# Altium PCB Mosquito.PcbDoc
Units mm, origin at the board's own origin, x right, y up, seen from the top; angles counter-clockwise.
Board outline 150 x 220 mm, 2 copper layers (Top Layer, Bottom Layer), stack 5.071 mm thick; 400 components, 2 nets, 400 pads, 0 vias.
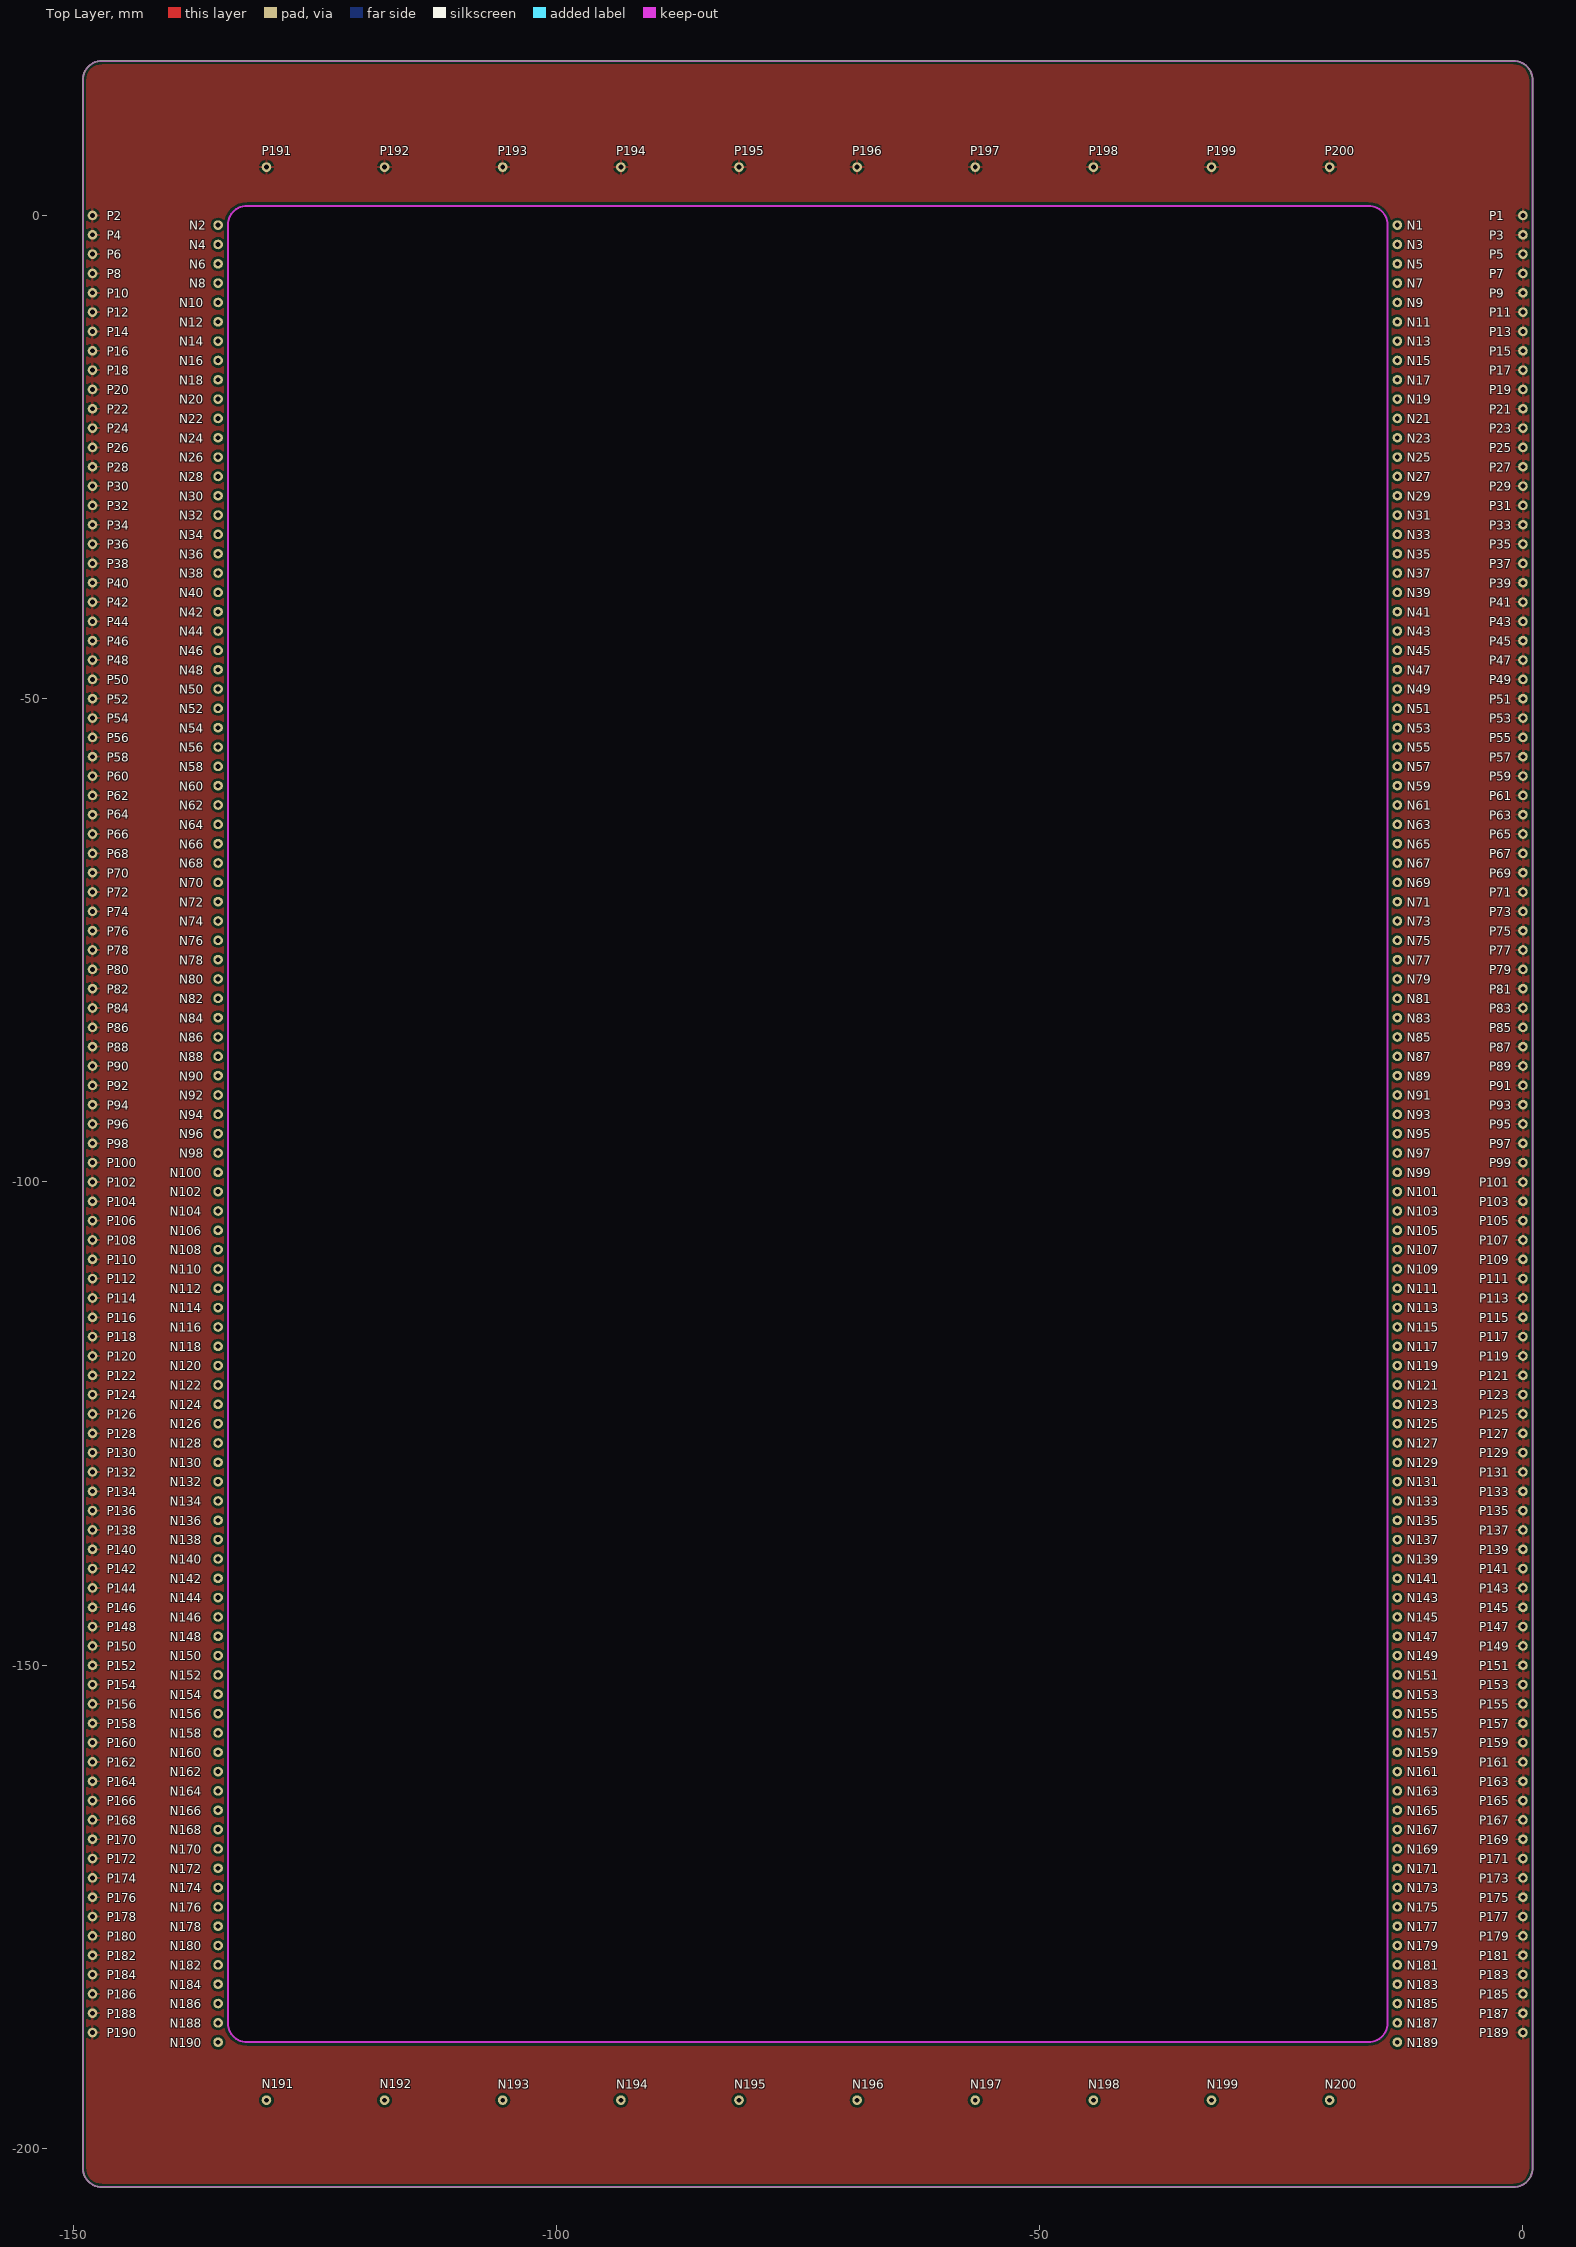
[diagram p0: Top Layer view]
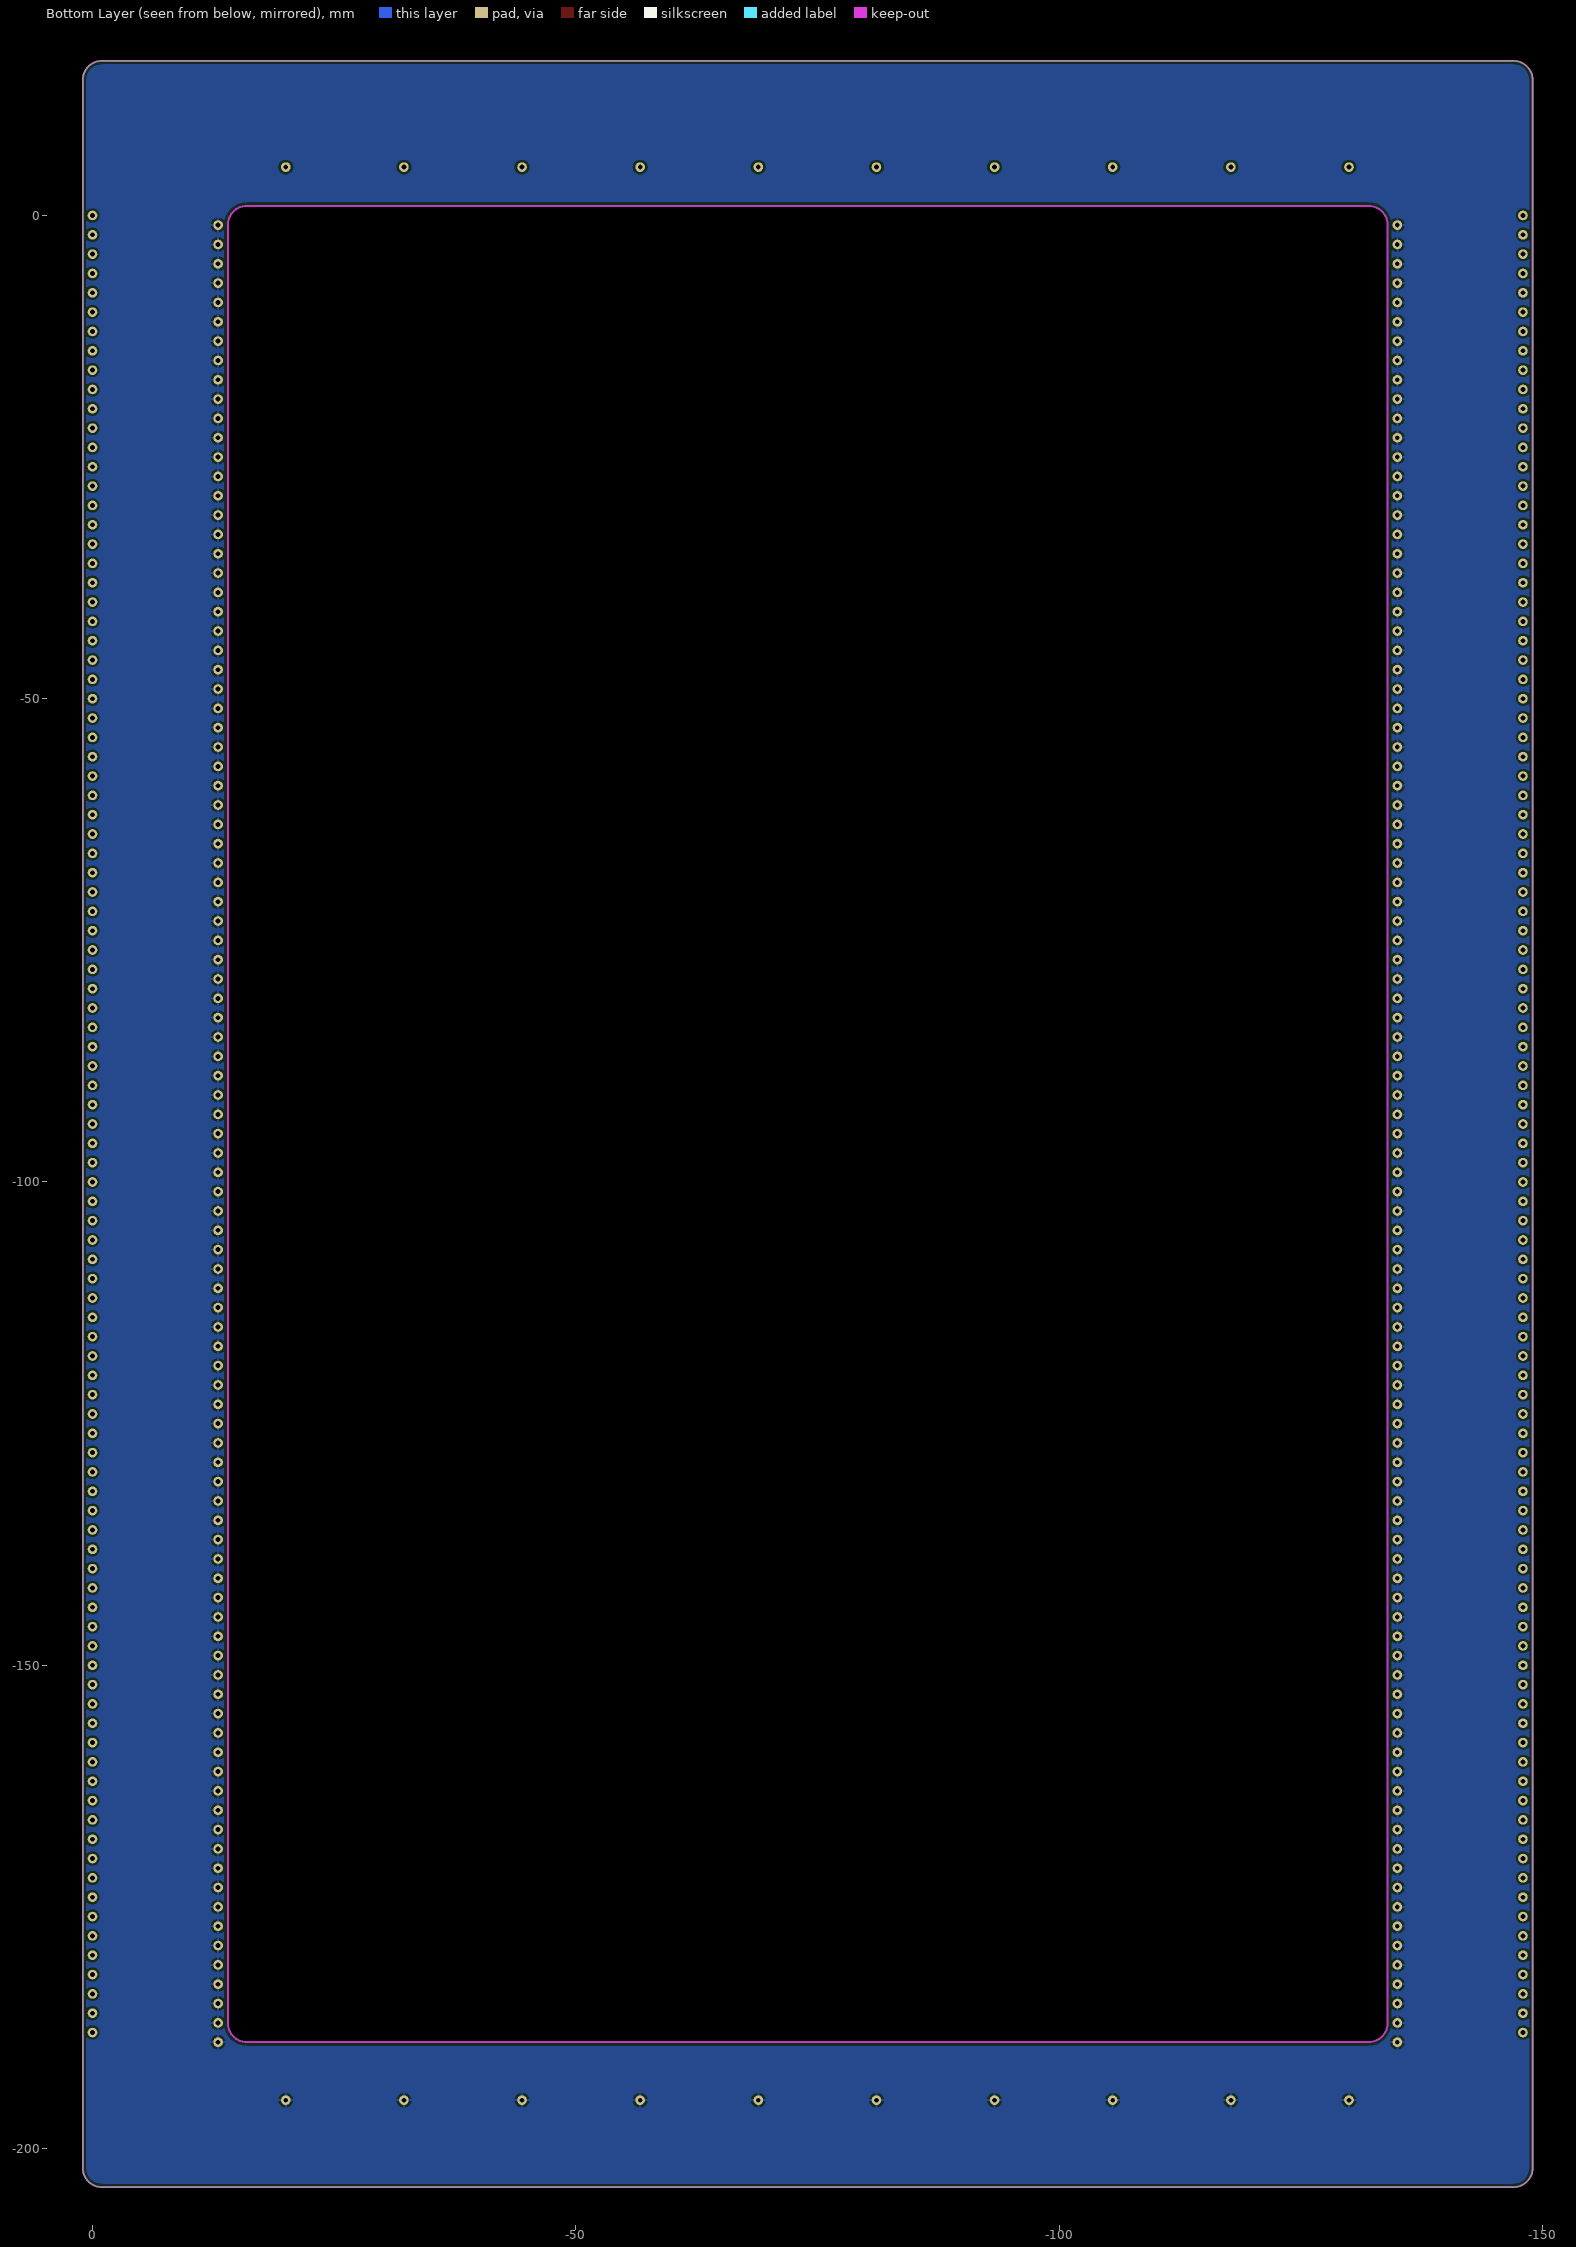
[diagram p1: Bottom Layer view, seen from below]

## Layer stack, top to bottom
Top Layer: signal copper 0.0356
Dielectric: core 5, FR-4, Dk 4.8
Bottom Layer: signal copper 0.0356

## Board outline
-147,-204 cw(c-147,-202) -149,-202 -149,14 cw(c-147,14) -147,16 -1,16 cw(c-1,14) 1,14 1,-202 cw(c-1,-202) -1,-204
cut-out: -134,-187 -134,-1 cw(c-132,-1) -132,1 -16,1 cw(c-16,-1) -14,-1 -14,-187 cw(c-16,-187) -16,-189 -132,-189 cw(c-132,-187)

## Design rules (kind name [scope] priority, off if disabled: settings)
Clearance [All] p1: gap=0.254
ComponentClearance [All] p1: gap=0.1 collisioncheckmode=3 verticalgap=0.1 showdistances=FALSE
HoleToHoleClearance [All] p1: gap=0.127 allowstackedmicrovias=TRUE
MinimumSolderMaskSliver [All] p1: minsoldermaskwidth=0.127
PolygonConnect [All] p1: connectstyle=Relief reliefconductorwidth=0.254 reliefentries=4 polygonreliefangle="90 Angle"
RoutingVias [All] p1: holewidth=0.711 width=1.27 viastyle="Through Hole" minholewidth=0.711 minwidth=1.27 maxholewidth=0.711 maxwidth=1.27
SilkscreenOverComponentPads [All] p1: minsilkscreentomaskgap=0.127
SolderMaskExpansion [All] p1: expansion=0.102
Width [All] p1: maxlimit=0.254 minlimit=0.254 preferedwidth=0.254
24 further rules are at their usual default settings.

## Classes and differential pairs
component class Mosquito: N1 N2 N3 N4 N5 N6 N7 N8 N9 N10 N11 N12 N13 N14 N15 N16 N17 N18 N19 N20 N21 N22 N23 N24 N25 N26 N27 N28 N29 N30 N31 N32 N33 N34 N35 N36 N37 N38 N39 N40 N41 N42 N43 N44 N45 N46 N47 N48 N49 N50 N51 N52 N53 N54 N55 N56 N57 N58 N59 N60 N61 N62 N63 N64 N65 N66 N67 N68 N69 N70 N71 N72 N73 N74 N75 N76 N77 N78 N79 N80 P1 P2 P3 P4 P5 P6 P7 P8 P9 P10 P11 P12 P13 P14 P15 P16 P17 P18 P19 P20 P21 P22 P23 P24 P25 P26 P27 P28 P29 P30 P31 P32 P33 P34 P35 P36 P37 P38 P39 P40 P41 P42 P43 P44 P45 P46 P47 P48 P49 P50 P51 P52 P53 P54 P55 P56 P57 P58 P59 P60 P61 P62 P63 P64 P65 P66 P67 P68 P69 P70 P71 P72 P73 P74 P75 P76 P77 P78 P79 P80
component class Mosquito2: N81 N82 N83 N84 N85 N86 N87 N88 N89 N90 N91 N92 N93 N94 N95 N96 N97 N98 N99 N100 N101 N102 N103 N104 N105 N106 N107 N108 N109 N110 N111 N112 N113 N114 N115 N116 N117 N118 N119 N120 N121 N122 N123 N124 N125 N126 N127 N128 N129 N130 N131 N132 N133 N134 N135 N136 N137 N138 N139 N140 N141 N142 N143 N144 N145 N146 N147 N148 N149 N150 N151 N152 N153 N154 N155 N156 N157 N158 N159 N160 P81 P82 P83 P84 P85 P86 P87 P88 P89 P90 P91 P92 P93 P94 P95 P96 P97 P98 P99 P100 P101 P102 P103 P104 P105 P106 P107 P108 P109 P110 P111 P112 P113 P114 P115 P116 P117 P118 P119 P120 P121 P122 P123 P124 P125 P126 P127 P128 P129 P130 P131 P132 P133 P134 P135 P136 P137 P138 P139 P140 P141 P142 P143 P144 P145 P146 P147 P148 P149 P150 P151 P152 P153 P154 P155 P156 P157 P158 P159 P160
component class Mosquito3: N161 N162 N163 N164 N165 N166 N167 N168 N169 N170 N171 N172 N173 N174 N175 N176 N177 N178 N179 N180 N181 N182 N183 N184 N185 N186 N187 N188 N189 N190 N191 N192 N193 N194 N195 N196 N197 N198 N199 N200 P161 P162 P163 P164 P165 P166 P167 P168 P169 P170 P171 P172 P173 P174 P175 P176 P177 P178 P179 P180 P181 P182 P183 P184 P185 P186 P187 P188 P189 P190 P191 P192 P193 P194 P195 P196 P197 P198 P199 P200

## Components (designator, comment, footprint, x,y, rotation, side; value= is the part's Value field where it differs from the comment)
N1 "Pad_N" PAD -13,-1 r0 top
N2 "Pad_N" PAD -135,-1 r0 top
N3 "Pad_N" PAD -13,-3 r0 top
N4 "Pad_N" PAD -135,-3 r90 top
N5 "Pad_N" PAD -13,-5 r180 top
N6 "Pad_N" PAD -135,-5 r0 top
N7 "Pad_N" PAD -13,-7 r0 top
N8 "Pad_N" PAD -135,-7 r0 top
N9 "Pad_N" PAD -13,-9 r0 top
N10 "Pad_N" PAD -135,-9 r90 top
N11 "Pad_N" PAD -13,-11 r90 top
N12 "Pad_N" PAD -135,-11 r0 top
N13 "Pad_N" PAD -13,-13 r90 top
N14 "Pad_N" PAD -135,-13 r0 top
N15 "Pad_N" PAD -13,-15 r90 top
N16 "Pad_N" PAD -135,-15 r0 top
N17 "Pad_N" PAD -13,-17 r90 top
N18 "Pad_N" PAD -135,-17 r0 top
N19 "Pad_N" PAD -13,-19 r90 top
N20 "Pad_N" PAD -135,-19 r0 top
N21 "Pad_N" PAD -13,-21 r90 top
N22 "Pad_N" PAD -135,-21 r0 top
N23 "Pad_N" PAD -13,-23 r90 top
N24 "Pad_N" PAD -135,-23 r0 top
N25 "Pad_N" PAD -13,-25 r90 top
N26 "Pad_N" PAD -135,-25 r0 top
N27 "Pad_N" PAD -13,-27 r90 top
N28 "Pad_N" PAD -135,-27 r0 top
N29 "Pad_N" PAD -13,-29 r90 top
N30 "Pad_N" PAD -135,-29 r0 top
N31 "Pad_N" PAD -13,-31 r90 top
N32 "Pad_N" PAD -135,-31 r0 top
N33 "Pad_N" PAD -13,-33 r90 top
N34 "Pad_N" PAD -135,-33 r0 top
N35 "Pad_N" PAD -13,-35 r90 top
N36 "Pad_N" PAD -135,-35 r0 top
N37 "Pad_N" PAD -13,-37 r90 top
N38 "Pad_N" PAD -135,-37 r0 top
N39 "Pad_N" PAD -13,-39 r90 top
N40 "Pad_N" PAD -135,-39 r0 top
N41 "Pad_N" PAD -13,-41 r90 top
N42 "Pad_N" PAD -135,-41 r0 top
N43 "Pad_N" PAD -13,-43 r90 top
N44 "Pad_N" PAD -135,-43 r0 top
N45 "Pad_N" PAD -13,-45 r90 top
N46 "Pad_N" PAD -135,-45 r0 top
N47 "Pad_N" PAD -13,-47 r90 top
N48 "Pad_N" PAD -135,-47 r0 top
N49 "Pad_N" PAD -13,-49 r90 top
N50 "Pad_N" PAD -135,-49 r0 top
N51 "Pad_N" PAD -13,-51 r90 top
N52 "Pad_N" PAD -135,-51 r0 top
N53 "Pad_N" PAD -13,-53 r90 top
N54 "Pad_N" PAD -135,-53 r0 top
N55 "Pad_N" PAD -13,-55 r90 top
N56 "Pad_N" PAD -135,-55 r0 top
N57 "Pad_N" PAD -13,-57 r90 top
N58 "Pad_N" PAD -135,-57 r0 top
N59 "Pad_N" PAD -13,-59 r90 top
N60 "Pad_N" PAD -135,-59 r0 top
N61 "Pad_N" PAD -13,-61 r90 top
N62 "Pad_N" PAD -135,-61 r0 top
N63 "Pad_N" PAD -13,-63 r90 top
N64 "Pad_N" PAD -135,-63 r0 top
N65 "Pad_N" PAD -13,-65 r90 top
N66 "Pad_N" PAD -135,-65 r0 top
N67 "Pad_N" PAD -13,-67 r90 top
N68 "Pad_N" PAD -135,-67 r0 top
N69 "Pad_N" PAD -13,-69 r90 top
N70 "Pad_N" PAD -135,-69 r0 top
N71 "Pad_N" PAD -13,-71 r90 top
N72 "Pad_N" PAD -135,-71 r0 top
N73 "Pad_N" PAD -13,-73 r90 top
N74 "Pad_N" PAD -135,-73 r0 top
N75 "Pad_N" PAD -13,-75 r90 top
N76 "Pad_N" PAD -135,-75 r0 top
N77 "Pad_N" PAD -13,-77 r90 top
N78 "Pad_N" PAD -135,-77 r0 top
N79 "Pad_N" PAD -13,-79 r90 top
N80 "Pad_N" PAD -135,-79 r0 top
N81 "Pad_N" Pad -13,-81 r0 top
N82 "Pad_N" Pad -135,-81 r0 top
N83 "Pad_N" Pad -13,-83 r0 top
N84 "Pad_N" Pad -135,-83 r0 top
N85 "Pad_N" Pad -13,-85 r0 top
N86 "Pad_N" Pad -135,-85 r0 top
N87 "Pad_N" Pad -13,-87 r0 top
N88 "Pad_N" Pad -135,-87 r0 top
N89 "Pad_N" Pad -13,-89 r0 top
N90 "Pad_N" Pad -135,-89 r0 top
N91 "Pad_N" Pad -13,-91 r0 top
N92 "Pad_N" Pad -135,-91 r0 top
N93 "Pad_N" Pad -13,-93 r0 top
N94 "Pad_N" Pad -135,-93 r0 top
N95 "Pad_N" Pad -13,-95 r0 top
N96 "Pad_N" Pad -135,-95 r0 top
N97 "Pad_N" Pad -13,-97 r0 top
N98 "Pad_N" Pad -135,-97 r0 top
N99 "Pad_N" Pad -13,-99 r0 top
N100 "Pad_N" Pad -135,-99 r0 top
N101 "Pad_N" Pad -13,-101 r0 top
N102 "Pad_N" Pad -135,-101 r0 top
N103 "Pad_N" Pad -13,-103 r0 top
N104 "Pad_N" Pad -135,-103 r0 top
N105 "Pad_N" Pad -13,-105 r0 top
N106 "Pad_N" Pad -135,-105 r0 top
N107 "Pad_N" Pad -13,-107 r0 top
N108 "Pad_N" Pad -135,-107 r0 top
N109 "Pad_N" Pad -13,-109 r0 top
N110 "Pad_N" Pad -135,-109 r0 top
N111 "Pad_N" Pad -13,-111 r0 top
N112 "Pad_N" Pad -135,-111 r0 top
N113 "Pad_N" Pad -13,-113 r0 top
N114 "Pad_N" Pad -135,-113 r0 top
N115 "Pad_N" Pad -13,-115 r0 top
N116 "Pad_N" Pad -135,-115 r0 top
N117 "Pad_N" Pad -13,-117 r0 top
N118 "Pad_N" Pad -135,-117 r0 top
N119 "Pad_N" Pad -13,-119 r0 top
N120 "Pad_N" Pad -135,-119 r0 top
N121 "Pad_N" Pad -13,-121 r0 top
N122 "Pad_N" Pad -135,-121 r0 top
N123 "Pad_N" Pad -13,-123 r0 top
N124 "Pad_N" Pad -135,-123 r0 top
N125 "Pad_N" Pad -13,-125 r0 top
N126 "Pad_N" Pad -135,-125 r0 top
N127 "Pad_N" Pad -13,-127 r0 top
N128 "Pad_N" Pad -135,-127 r0 top
N129 "Pad_N" Pad -13,-129 r0 top
N130 "Pad_N" Pad -135,-129 r0 top
N131 "Pad_N" Pad -13,-131 r0 top
N132 "Pad_N" Pad -135,-131 r0 top
N133 "Pad_N" Pad -13,-133 r0 top
N134 "Pad_N" Pad -135,-133 r0 top
N135 "Pad_N" Pad -13,-135 r0 top
N136 "Pad_N" Pad -135,-135 r0 top
N137 "Pad_N" Pad -13,-137 r0 top
N138 "Pad_N" Pad -135,-137 r0 top
N139 "Pad_N" Pad -13,-139 r0 top
N140 "Pad_N" Pad -135,-139 r0 top
N141 "Pad_N" Pad -13,-141 r0 top
N142 "Pad_N" Pad -135,-141 r0 top
N143 "Pad_N" Pad -13,-143 r0 top
N144 "Pad_N" Pad -135,-143 r0 top
N145 "Pad_N" Pad -13,-145 r0 top
N146 "Pad_N" Pad -135,-145 r0 top
N147 "Pad_N" Pad -13,-147 r0 top
N148 "Pad_N" Pad -135,-147 r0 top
N149 "Pad_N" Pad -13,-149 r0 top
N150 "Pad_N" Pad -135,-149 r0 top
N151 "Pad_N" Pad -13,-151 r0 top
N152 "Pad_N" Pad -135,-151 r0 top
N153 "Pad_N" Pad -13,-153 r0 top
N154 "Pad_N" Pad -135,-153 r0 top
N155 "Pad_N" Pad -13,-155 r0 top
N156 "Pad_N" Pad -135,-155 r0 top
N157 "Pad_N" Pad -13,-157 r0 top
N158 "Pad_N" Pad -135,-157 r0 top
N159 "Pad_N" Pad -13,-159 r0 top
N160 "Pad_N" Pad -135,-159 r0 top
N161 "Pad_N" Pad -13,-161 r0 top
N162 "Pad_N" Pad -135,-161 r0 top
N163 "Pad_N" Pad -13,-163 r0 top
N164 "Pad_N" Pad -135,-163 r0 top
N165 "Pad_N" Pad -13,-165 r0 top
N166 "Pad_N" Pad -135,-165 r0 top
N167 "Pad_N" Pad -13,-167 r0 top
N168 "Pad_N" Pad -135,-167 r0 top
N169 "Pad_N" Pad -13,-169 r0 top
N170 "Pad_N" Pad -135,-169 r0 top
N171 "Pad_N" Pad -13,-171 r0 top
N172 "Pad_N" Pad -135,-171 r0 top
N173 "Pad_N" Pad -13,-173 r0 top
N174 "Pad_N" Pad -135,-173 r0 top
N175 "Pad_N" Pad -13,-175 r0 top
N176 "Pad_N" Pad -135,-175 r0 top
N177 "Pad_N" Pad -13,-177 r0 top
N178 "Pad_N" Pad -135,-177 r0 top
N179 "Pad_N" Pad -13,-179 r0 top
N180 "Pad_N" Pad -135,-179 r0 top
N181 "Pad_N" Pad -13,-181 r0 top
N182 "Pad_N" Pad -135,-181 r0 top
N183 "Pad_N" Pad -13,-183 r0 top
N184 "Pad_N" Pad -135,-183 r0 top
N185 "Pad_N" Pad -13,-185 r0 top
N186 "Pad_N" Pad -135,-185 r0 top
N187 "Pad_N" Pad -13,-187 r0 top
N188 "Pad_N" Pad -135,-187 r0 top
N189 "Pad_N" Pad -13,-189 r0 top
N190 "Pad_N" Pad -135,-189 r0 top
N191 "Pad_N" Pad -130,-195 r90 top
N192 "Pad_N" Pad -117.778,-195 r90 top
N193 "Pad_N" Pad -105.556,-195 r90 top
N194 "Pad_N" Pad -93.333,-195 r90 top
N195 "Pad_N" Pad -81.111,-195 r90 top
N196 "Pad_N" Pad -68.889,-195 r90 top
N197 "Pad_N" Pad -56.667,-195 r90 top
N198 "Pad_N" Pad -44.444,-195 r90 top
N199 "Pad_N" Pad -32.222,-195 r90 top
N200 "Pad_N" Pad -20,-195 r90 top
P1 "Pad_P" PAD 0,0 r0 top
P2 "Pad_P" PAD -148,0 r0 top
P3 "Pad_P" PAD 0,-2 r0 top
P4 "Pad_P" PAD -148,-2 r0 top
P5 "Pad_P" PAD 0,-4 r0 top
P6 "Pad_P" PAD -148,-4 r0 top
P7 "Pad_P" PAD 0,-6 r0 top
P8 "Pad_P" PAD -148,-6 r0 top
P9 "Pad_P" PAD 0,-8 r0 top
P10 "Pad_P" PAD -148,-8 r90 top
P11 "Pad_P" PAD 0,-10 r90 top
P12 "Pad_P" PAD -148,-10 r0 top
P13 "Pad_P" PAD 0,-12 r90 top
P14 "Pad_P" PAD -148,-12 r0 top
P15 "Pad_P" PAD 0,-14 r90 top
P16 "Pad_P" PAD -148,-14 r0 top
P17 "Pad_P" PAD 0,-16 r90 top
P18 "Pad_P" PAD -148,-16 r0 top
P19 "Pad_P" PAD 0,-18 r90 top
P20 "Pad_P" PAD -148,-18 r0 top
P21 "Pad_P" PAD 0,-20 r90 top
P22 "Pad_P" PAD -148,-20 r0 top
P23 "Pad_P" PAD 0,-22 r90 top
P24 "Pad_P" PAD -148,-22 r0 top
P25 "Pad_P" PAD 0,-24 r90 top
P26 "Pad_P" PAD -148,-24 r0 top
P27 "Pad_P" PAD 0,-26 r90 top
P28 "Pad_P" PAD -148,-26 r0 top
P29 "Pad_P" PAD 0,-28 r90 top
P30 "Pad_P" PAD -148,-28 r0 top
P31 "Pad_P" PAD 0,-30 r90 top
P32 "Pad_P" PAD -148,-30 r0 top
P33 "Pad_P" PAD 0,-32 r90 top
P34 "Pad_P" PAD -148,-32 r0 top
P35 "Pad_P" PAD 0,-34 r90 top
P36 "Pad_P" PAD -148,-34 r0 top
P37 "Pad_P" PAD 0,-36 r90 top
P38 "Pad_P" PAD -148,-36 r0 top
P39 "Pad_P" PAD 0,-38 r90 top
P40 "Pad_P" PAD -148,-38 r0 top
P41 "Pad_P" PAD 0,-40 r90 top
P42 "Pad_P" PAD -148,-40 r0 top
P43 "Pad_P" PAD 0,-42 r90 top
P44 "Pad_P" PAD -148,-42 r0 top
P45 "Pad_P" PAD 0,-44 r90 top
P46 "Pad_P" PAD -148,-44 r0 top
P47 "Pad_P" PAD 0,-46 r90 top
P48 "Pad_P" PAD -148,-46 r0 top
P49 "Pad_P" PAD 0,-48 r90 top
P50 "Pad_P" PAD -148,-48 r0 top
P51 "Pad_P" PAD 0,-50 r90 top
P52 "Pad_P" PAD -148,-50 r0 top
P53 "Pad_P" PAD 0,-52 r90 top
P54 "Pad_P" PAD -148,-52 r0 top
P55 "Pad_P" PAD 0,-54 r90 top
P56 "Pad_P" PAD -148,-54 r0 top
P57 "Pad_P" PAD 0,-56 r90 top
P58 "Pad_P" PAD -148,-56 r0 top
P59 "Pad_P" PAD 0,-58 r90 top
P60 "Pad_P" PAD -148,-58 r0 top
P61 "Pad_P" PAD 0,-60 r90 top
P62 "Pad_P" PAD -148,-60 r0 top
P63 "Pad_P" PAD 0,-62 r90 top
P64 "Pad_P" PAD -148,-62 r0 top
P65 "Pad_P" PAD 0,-64 r90 top
P66 "Pad_P" PAD -148,-64 r0 top
P67 "Pad_P" PAD 0,-66 r90 top
P68 "Pad_P" PAD -148,-66 r0 top
P69 "Pad_P" PAD 0,-68 r90 top
P70 "Pad_P" PAD -148,-68 r0 top
P71 "Pad_P" PAD 0,-70 r90 top
P72 "Pad_P" PAD -148,-70 r0 top
P73 "Pad_P" PAD 0,-72 r90 top
P74 "Pad_P" PAD -148,-72 r0 top
P75 "Pad_P" PAD 0,-74 r90 top
P76 "Pad_P" PAD -148,-74 r0 top
P77 "Pad_P" PAD 0,-76 r90 top
P78 "Pad_P" PAD -148,-76 r0 top
P79 "Pad_P" PAD 0,-78 r90 top
P80 "Pad_P" PAD -148,-78 r0 top
P81 "Pad_P" Pad 0,-80 r0 top
P82 "Pad_P" Pad -148,-80 r0 top
P83 "Pad_P" Pad 0,-82 r0 top
P84 "Pad_P" Pad -148,-82 r0 top
P85 "Pad_P" Pad 0,-84 r0 top
P86 "Pad_P" Pad -148,-84 r0 top
P87 "Pad_P" Pad 0,-86 r0 top
P88 "Pad_P" Pad -148,-86 r0 top
P89 "Pad_P" Pad 0,-88 r0 top
P90 "Pad_P" Pad -148,-88 r0 top
P91 "Pad_P" Pad 0,-90 r0 top
P92 "Pad_P" Pad -148,-90 r0 top
P93 "Pad_P" Pad 0,-92 r0 top
P94 "Pad_P" Pad -148,-92 r0 top
P95 "Pad_P" Pad 0,-94 r0 top
P96 "Pad_P" Pad -148,-94 r0 top
P97 "Pad_P" Pad 0,-96 r0 top
P98 "Pad_P" Pad -148,-96 r0 top
P99 "Pad_P" Pad 0,-98 r0 top
P100 "Pad_P" Pad -148,-98 r0 top
P101 "Pad_P" Pad 0,-100 r0 top
P102 "Pad_P" Pad -148,-100 r0 top
P103 "Pad_P" Pad 0,-102 r0 top
P104 "Pad_P" Pad -148,-102 r0 top
P105 "Pad_P" Pad 0,-104 r0 top
P106 "Pad_P" Pad -148,-104 r0 top
P107 "Pad_P" Pad 0,-106 r0 top
P108 "Pad_P" Pad -148,-106 r0 top
P109 "Pad_P" Pad 0,-108 r0 top
P110 "Pad_P" Pad -148,-108 r0 top
P111 "Pad_P" Pad 0,-110 r0 top
P112 "Pad_P" Pad -148,-110 r0 top
P113 "Pad_P" Pad 0,-112 r0 top
P114 "Pad_P" Pad -148,-112 r0 top
P115 "Pad_P" Pad 0,-114 r0 top
P116 "Pad_P" Pad -148,-114 r0 top
P117 "Pad_P" Pad 0,-116 r0 top
P118 "Pad_P" Pad -148,-116 r0 top
P119 "Pad_P" Pad 0,-118 r0 top
P120 "Pad_P" Pad -148,-118 r0 top
P121 "Pad_P" Pad 0,-120 r0 top
P122 "Pad_P" Pad -148,-120 r0 top
P123 "Pad_P" Pad 0,-122 r0 top
P124 "Pad_P" Pad -148,-122 r0 top
P125 "Pad_P" Pad 0,-124 r0 top
P126 "Pad_P" Pad -148,-124 r0 top
P127 "Pad_P" Pad 0,-126 r0 top
P128 "Pad_P" Pad -148,-126 r0 top
P129 "Pad_P" Pad 0,-128 r0 top
P130 "Pad_P" Pad -148,-128 r0 top
P131 "Pad_P" Pad 0,-130 r0 top
P132 "Pad_P" Pad -148,-130 r0 top
P133 "Pad_P" Pad 0,-132 r0 top
P134 "Pad_P" Pad -148,-132 r0 top
P135 "Pad_P" Pad 0,-134 r0 top
P136 "Pad_P" Pad -148,-134 r0 top
P137 "Pad_P" Pad 0,-136 r0 top
P138 "Pad_P" Pad -148,-136 r0 top
P139 "Pad_P" Pad 0,-138 r0 top
P140 "Pad_P" Pad -148,-138 r0 top
P141 "Pad_P" Pad 0,-140 r0 top
P142 "Pad_P" Pad -148,-140 r0 top
P143 "Pad_P" Pad 0,-142 r0 top
P144 "Pad_P" Pad -148,-142 r0 top
P145 "Pad_P" Pad 0,-144 r0 top
P146 "Pad_P" Pad -148,-144 r0 top
P147 "Pad_P" Pad 0,-146 r0 top
P148 "Pad_P" Pad -148,-146 r0 top
P149 "Pad_P" Pad 0,-148 r0 top
P150 "Pad_P" Pad -148,-148 r0 top
P151 "Pad_P" Pad 0,-150 r0 top
P152 "Pad_P" Pad -148,-150 r0 top
P153 "Pad_P" Pad 0,-152 r0 top
P154 "Pad_P" Pad -148,-152 r0 top
P155 "Pad_P" Pad 0,-154 r0 top
P156 "Pad_P" Pad -148,-154 r0 top
P157 "Pad_P" Pad 0,-156 r0 top
P158 "Pad_P" Pad -148,-156 r0 top
P159 "Pad_P" Pad 0,-158 r0 top
P160 "Pad_P" Pad -148,-158 r0 top
P161 "Pad_P" Pad 0,-160 r0 top
P162 "Pad_P" Pad -148,-160 r0 top
P163 "Pad_P" Pad 0,-162 r0 top
P164 "Pad_P" Pad -148,-162 r0 top
P165 "Pad_P" Pad 0,-164 r0 top
P166 "Pad_P" Pad -148,-164 r0 top
P167 "Pad_P" Pad 0,-166 r0 top
P168 "Pad_P" Pad -148,-166 r0 top
P169 "Pad_P" Pad 0,-168 r0 top
P170 "Pad_P" Pad -148,-168 r0 top
P171 "Pad_P" Pad 0,-170 r0 top
P172 "Pad_P" Pad -148,-170 r0 top
P173 "Pad_P" Pad 0,-172 r0 top
P174 "Pad_P" Pad -148,-172 r0 top
P175 "Pad_P" Pad 0,-174 r0 top
P176 "Pad_P" Pad -148,-174 r0 top
P177 "Pad_P" Pad 0,-176 r0 top
P178 "Pad_P" Pad -148,-176 r0 top
P179 "Pad_P" Pad 0,-178 r0 top
P180 "Pad_P" Pad -148,-178 r0 top
P181 "Pad_P" Pad 0,-180 r0 top
P182 "Pad_P" Pad -148,-180 r0 top
P183 "Pad_P" Pad 0,-182 r0 top
P184 "Pad_P" Pad -148,-182 r0 top
P185 "Pad_P" Pad 0,-184 r0 top
P186 "Pad_P" Pad -148,-184 r0 top
P187 "Pad_P" Pad 0,-186 r0 top
P188 "Pad_P" Pad -148,-186 r0 top
P189 "Pad_P" Pad 0,-188 r0 top
P190 "Pad_P" Pad -148,-188 r0 top
P191 "Pad_P" Pad -130,5 r90 top
P192 "Pad_P" Pad -117.778,5 r90 top
P193 "Pad_P" Pad -105.556,5 r90 top
P194 "Pad_P" Pad -93.333,5 r90 top
P195 "Pad_P" Pad -81.111,5 r90 top
P196 "Pad_P" Pad -68.889,5 r90 top
P197 "Pad_P" Pad -56.667,5 r90 top
P198 "Pad_P" Pad -44.444,5 r90 top
P199 "Pad_P" Pad -32.222,5 r90 top
P200 "Pad_P" Pad -20,5 r90 top

## Footprints (in the part's own frame and the unit in brackets; to place one, negate y for a bottom-side part, rotate by r counter-clockwise, add the part's x,y. Pads: shape width x height; smd on the part's side, far side on the other; paste and mask are expansions set on the pad)
PAD [mm]
  round 1 hole 0.5: 1(0,0)
Pad [mm]
  round 1 hole 0.5: 1(0,0)

## Nets (pads, with @x,y where several pads share a name; then routed paths per layer and width w, separated by ;. In a path a pad name is that pad's centre, name@x,y a point inside that pad or via, vN(x,y) a via of type N, cw(c..) or ccw(c..) an arc to the next point about the centre after c; other vN are vias at no path point)
GND: P1.1 P2.1 P3.1 P4.1 P5.1 P6.1 P7.1 P8.1 P9.1 P10.1 P11.1 P12.1 P13.1 P14.1 P15.1 P16.1 P17.1 P18.1 P19.1 P20.1 P21.1 P22.1 P23.1 P24.1 P25.1 P26.1 P27.1 P28.1 P29.1 P30.1 P31.1 P32.1 P33.1 P34.1 P35.1 P36.1 P37.1 P38.1 P39.1 P40.1 P41.1 P42.1 P43.1 P44.1 P45.1 P46.1 P47.1 P48.1 P49.1 P50.1 P51.1 P52.1 P53.1 P54.1 P55.1 P56.1 P57.1 P58.1 P59.1 P60.1 P61.1 P62.1 P63.1 P64.1 P65.1 P66.1 P67.1 P68.1 P69.1 P70.1 P71.1 P72.1 P73.1 P74.1 P75.1 P76.1 P77.1 P78.1 P79.1 P80.1 P81.1 P82.1 P83.1 P84.1 P85.1 P86.1 P87.1 P88.1 P89.1 P90.1 P91.1 P92.1 P93.1 P94.1 P95.1 P96.1 P97.1 P98.1 P99.1 P100.1 P101.1 P102.1 P103.1 P104.1 P105.1 P106.1 P107.1 P108.1 P109.1 P110.1 P111.1 P112.1 P113.1 P114.1 P115.1 P116.1 P117.1 P118.1 P119.1 P120.1 P121.1 P122.1 P123.1 P124.1 P125.1 P126.1 P127.1 P128.1 P129.1 P130.1 P131.1 P132.1 P133.1 P134.1 P135.1 P136.1 P137.1 P138.1 P139.1 P140.1 P141.1 P142.1 P143.1 P144.1 P145.1 P146.1 P147.1 P148.1 P149.1 P150.1 P151.1 P152.1 P153.1 P154.1 P155.1 P156.1 P157.1 P158.1 P159.1 P160.1 P161.1 P162.1 P163.1 P164.1 P165.1 P166.1 P167.1 P168.1 P169.1 P170.1 P171.1 P172.1 P173.1 P174.1 P175.1 P176.1 P177.1 P178.1 P179.1 P180.1 P181.1 P182.1 P183.1 P184.1 P185.1 P186.1 P187.1 P188.1 P189.1 P190.1 P191.1 P192.1 P193.1 P194.1 P195.1 P196.1 P197.1 P198.1 P199.1 P200.1
VCC: N1.1 N2.1 N3.1 N4.1 N5.1 N6.1 N7.1 N8.1 N9.1 N10.1 N11.1 N12.1 N13.1 N14.1 N15.1 N16.1 N17.1 N18.1 N19.1 N20.1 N21.1 N22.1 N23.1 N24.1 N25.1 N26.1 N27.1 N28.1 N29.1 N30.1 N31.1 N32.1 N33.1 N34.1 N35.1 N36.1 N37.1 N38.1 N39.1 N40.1 N41.1 N42.1 N43.1 N44.1 N45.1 N46.1 N47.1 N48.1 N49.1 N50.1 N51.1 N52.1 N53.1 N54.1 N55.1 N56.1 N57.1 N58.1 N59.1 N60.1 N61.1 N62.1 N63.1 N64.1 N65.1 N66.1 N67.1 N68.1 N69.1 N70.1 N71.1 N72.1 N73.1 N74.1 N75.1 N76.1 N77.1 N78.1 N79.1 N80.1 N81.1 N82.1 N83.1 N84.1 N85.1 N86.1 N87.1 N88.1 N89.1 N90.1 N91.1 N92.1 N93.1 N94.1 N95.1 N96.1 N97.1 N98.1 N99.1 N100.1 N101.1 N102.1 N103.1 N104.1 N105.1 N106.1 N107.1 N108.1 N109.1 N110.1 N111.1 N112.1 N113.1 N114.1 N115.1 N116.1 N117.1 N118.1 N119.1 N120.1 N121.1 N122.1 N123.1 N124.1 N125.1 N126.1 N127.1 N128.1 N129.1 N130.1 N131.1 N132.1 N133.1 N134.1 N135.1 N136.1 N137.1 N138.1 N139.1 N140.1 N141.1 N142.1 N143.1 N144.1 N145.1 N146.1 N147.1 N148.1 N149.1 N150.1 N151.1 N152.1 N153.1 N154.1 N155.1 N156.1 N157.1 N158.1 N159.1 N160.1 N161.1 N162.1 N163.1 N164.1 N165.1 N166.1 N167.1 N168.1 N169.1 N170.1 N171.1 N172.1 N173.1 N174.1 N175.1 N176.1 N177.1 N178.1 N179.1 N180.1 N181.1 N182.1 N183.1 N184.1 N185.1 N186.1 N187.1 N188.1 N189.1 N190.1 N191.1 N192.1 N193.1 N194.1 N195.1 N196.1 N197.1 N198.1 N199.1 N200.1

## Polygon pours and split planes (outlines as drawn)
VCC on Bottom Layer "Keep-Out Layer-No Net" (solid, pour order 1000): -147,-204 cw(c-147,-202) -149,-202 -149,14 cw(c-147,14) -147,16 -1,16 cw(c-1,14) 1,14 1,-202 cw(c-1,-202) -1,-204
GND on Top Layer "Keep-Out Layer-No Net" (solid, pour order 1001): -147,-204 cw(c-147,-202) -149,-202 -149,14 cw(c-147,14) -147,16 -1,16 cw(c-1,14) 1,14 1,-202 cw(c-1,-202) -1,-204

## Keep-outs
Keep-Out Layer:
  lines w0.2: -149,-202 ccw(c-147,-202) -147,-204 -1,-204 ccw(c-1,-202) 1,-202 1,14 ccw(c-1,14) -1,16 -147,16 ccw(c-147,14) -149,14 -149,-202 ; -134,-187 ccw(c-132,-187) -132,-189 -16,-189 ccw(c-16,-187) -14,-187 -14,-1 ccw(c-16,-1) -16,1 -132,1 ccw(c-132,-1) -134,-1 -134,-187